# EAGLE board piezo-preamp-tickler_V3-1_single-supply-OPA1612 (EAGLE 8.4.3)

Size 100 x 66 mm. Coordinates in mm from the lower left corner, seen from the top.
Outline: 0,0 100,0 100,66 0,66 0,0
Copper layers (1*16): Top 0.0356mm / dielectric 1.5011mm / Bottom 0.0356mm
Design rules "oshpark-2layer *": minimum track width 16mil, minimum drill 13mil, track to track 16mil, track to pad 16mil, pad to pad 16mil, via to via 16mil, smd to smd 16mil, copper to edge 15mil, drill to drill 6mil, minimum pad ring 7mil, minimum via ring 7mil, stop-mask expansion 2.5mil, vias tented up to drill 0mil, thermal gap 10mil
Net classes: 0 default: width 0.152 mm, clearance 0.2 mm
Holes 4 mm at 5,5 95,5 5,61 95,60

## Footprints (pad centres in the part's own frame; a part is rotated, then mirrored left to right if it is on the bottom)
C1206 = smd 1.6 x 1.8: 1 -1.4,0; 2 1.4,0
E2,5-6E = drill 0.813 pad 1.575: + -1.27,0 | drill 0.813 pad 1.575 octagon: - 1.27,0
EIA7343-31/D-R = smd 2.55 x 2.7: + 3.175,0; - -3.175,0
C0805K = smd 1.1 x 1.4: 1 -1,0; 2 1,0
JST-PH-2-THM = drill 0.8 pad 1.422: 1 1,0; 2 -1,0
SOD123 = smd 1.4 x 1.4: A 1.9,0; C -1.9,0
TRRS_SJ-43514-SMT-TR = smd 1.524 x 3.175: EARTH -2.114,-5.271; RING1 2.644,2.759; RING2 0.66,-5.271; TIP 9.948,-5.271 | hole 1.778: 1.6,-1.15; 8.6,-1.15
SO08 = smd 0.6 x 2.2: 1 -1.905,-2.6; 2 -0.635,-2.6; 3 0.635,-2.6; 4 1.905,-2.6; 5 1.905,2.6; 6 0.635,2.6; 7 -0.635,2.6; 8 -1.905,2.6
1X02_LOCK = drill 1.016 pad 1.88: 1 -0.178,0; 2 2.718,0
1X03_LOCK = drill 1.016 pad 1.88: 1 0,0.127; 2 2.54,-0.127; 3 5.08,0.127
LBC-SE = drill 0.914 octagon: 1 -2.54,0; 2 2.54,0
LED3MM = drill 0.813 octagon: A -1.27,0; K 1.27,0
SOT23 = smd 1 x 1.4: 1 -0.95,-1.1; 2 0.95,-1.1; 3 0,1.1
TO92- = drill 0.7 octagon: 1 2.54,0; 2 0,0; 3 -2.54,0
R0603 = smd 1 x 1.1: 1 -0.85,0; 2 0.85,0
0204V = drill 0.813 pad 1.676 octagon: 1 -1.27,0; 2 1.27,0
TRIMPOT-MULTI = drill 0.8 octagon: P$1 -2.54,-4.699; P$3 -2.54,-2.159; P$4 -2.54,-2.159; P$6 -2.54,0.381; P$9 -2.54,4.191; P$10 0,-4.699; P$12 0,-2.159; P$13 0,-2.159; P$15 0,0.381; P$16 0,2.921; P$18 0,4.191; P$20 2.54,-4.699; P$21 2.54,-2.159; P$22 2.54,-2.159; P$24 2.54,0.381; P$27 2.54,4.191

## Placement (x,y rotation side)
C1  10uF  [C1206]  29,10 270 top
C1A  10uF  [E2,5-6E]  35,10 270 top
C2  10uF  [C1206]  50,55 270 top
C2A  10uF  [E2,5-6E]  57,55 270 top
C3  mnove  [EIA7343-31/D-R]  42,26 0 top
C3A  100uF  [E2,5-6E]  42,20 0 top
C4  0.1uF  [C0805K]  65,55 270 top
C4A  0.1uF  [E2,5-6E]  71,55 270 top
C5  0.1uF  [C0805K]  14,56 270 top
C5A  0.1uF  [E2,5-6E]  20,56 270 top
C6  10uF  [C1206]  50,39 0 top
C6A  10uF  [E2,5-6E]  50,33 0 top
CN1  [JST-PH-2-THM]  3,27 90 top
D1  1N4148W  [SOD123]  21,30 270 top
D2  1N4148W  [SOD123]  21,21 90 top
HEADSET  SJ-43514  [TRRS_SJ-43514-SMT-TR]  96,38 180 top
IC1  OPA1612  [SO08]  38.09,35.37 0 top
J1  [1X02_LOCK]  2,38 270 top
J2  phone/mixer-switch  [1X03_LOCK]  60,34 270 top
J3  phone/mixer-switch  [1X03_LOCK]  78.62,13.89 270 top
L1  100uH  [LBC-SE]  7,48 0 top
LED1  [LED3MM]  12,35 0 top
PHONE  SJ-43514  [TRRS_SJ-43514-SMT-TR]  96,14 180 top
Q1  J201  [SOT23]  30.05,29.07 0 top
Q1A  2N5486  [TO92-]  23,36 0 top
Q2  MMBFJ201  [SOT23]  75.05,33.17 0 top
Q2A  2N5486  [TO92-]  75,44 0 top
R1  100K  [R0603]  13,28 0 top
R1A  100K  [0204V]  13.73,21.3 0 top
R2  10M  [R0603]  21,13 90 top
R2A  10M  [0204V]  15,13 90 top
R3  1.2K  [R0603]  32,19 90 top
R3A  1.2K  [0204V]  27,19 90 top
R4  2.2K  [R0603]  21,45 90 top
R4A  2.2K  [0204V]  27,45 90 top
R5  2.2K  [R0603]  42,10 90 top
R5A  2.2K  [0204V]  48,11 90 top
R6  100K  [R0603]  35,57 90 top
R6A  100K  [0204V]  41,58 90 top
R7  100K  [R0603]  35,50 90 top
R7A  100K  [0204V]  41,50 90 top
R8  220  [R0603]  51,27 0 top
R8A  220  [0204V]  52,20 0 top
R9  220  [R0603]  80,58 0 top
R9A  220  [0204V]  81,52 0 top
R10  1K  [R0603]  66,34 180 top
R10A  1K  [0204V]  66,29 0 top
R11  1M  [R0603]  61,20 90 top
R11A  1M  [0204V]  67,21 90 top
R12  1.2K  [R0603]  73,23 90 top
R12A  1.2K  [0204V]  79,24 90 top
R13  2.2K  [R0603]  85,27 90 top
R13A  2.2K  [0204V]  91,27 90 top
R14  1.2K  [R0603]  12,41 180 top
R15  20K  [TRIMPOT-MULTI]  62,9 0 top

## Library data of the parts
C1 C4-C6 CN1 = adafruit
C1A C2 C2A C3A C4A C5A C6A = rcl
C3 = microbuilder
D1 D2 HEADSET PHONE Q1A Q2A R1 R1A R2 R2A R3 R3A R4 R4A R5 R5A R6 R6A R7 R7A R8 R8A R9 R9A R10 R10A R11 R11A R12 R12A R13 R13A R14 R15 = CMU-ArtFab
IC1 = linear
J1 = SparkFun-Connectors; V: +12V
J2 J3 = SparkFun-Connectors
L1 = inductors
LED1 = led
Q1 Q2 = transistor-fet

## Nets
+12V: J1.1 L1.1 R4.2 R4A.2 R14.2
DRAINE1: IC1.3 Q1.1 Q1A.3 R4.1 R4A.1 R5.2 R5A.2
GATE1: D1.C Q1.3 Q1A.1 R1.2 R1A.2 R2.2 R2A.2
GATE2: Q2.3 Q2A.1 R10.1 R10A.2 R11.2 R11A.2
GND: C1.2 C1A.- C2.2 C2A.- C4.2 C4A.- C5.2 C5A.- CN1.1 D2.C HEADSET.RING2 IC1.4 J1.2 LED1.K PHONE.RING2 R3.1 R3A.1 R5.1 R5A.1 R7.1 R7A.1 R11.1 R11A.1 R12.1 R12A.1 R13.1 R13A.1
N$1: C3.+ C3A.+ IC1.1 IC1.2
N$2: LED1.A R14.1
N$3: J2.3 R10.2 R10A.1
N$4: D1.A D2.A
N$16: IC1.5 R9.2 R9A.2
N$22: IC1.6 R8.2 R8A.2 R15.P$1 R15.P$3 R15.P$4 R15.P$6 R15.P$9
N$23: C6.2 C6A.- J2.2
N$24: CN1.2 R1.1 R1A.1
N$31: C6.1 C6A.+ IC1.7 R15.P$10 R15.P$12 R15.P$13 R15.P$15 R15.P$16 R15.P$18
N$32: C5.1 C5A.+ IC1.8 L1.2 R6.2 R6A.2
N$35: C2.1 C2A.+ C4.1 C4A.+ R2.1 R2A.1 R6.1 R6A.1 R7.2 R7A.2 R9.1 R9A.1
N$42: J2.1 J3.1
N$44: HEADSET.TIP PHONE.TIP
N$45: HEADSET.RING1 PHONE.RING1
N$46: J3.2 PHONE.EARTH
N$52: C3.- C3A.- R8.1 R8A.1
NAME: J3.3 Q2.1 Q2A.3 R13.2 R13A.2
SOURCE: Q2.2 Q2A.2 R12.2 R12A.2
SOURCE1: C1.1 C1A.+ Q1.2 Q1A.2 R3.2 R3A.2

## Tracks (layer width: path | path; a pad name or v marks a point on that pad's centre or on a via)
+12V  (4 unrouted)
DRAINE1  (6 unrouted)
GATE1  (6 unrouted)
GATE2  (5 unrouted)
GND  (26 unrouted)
N$1  (3 unrouted)
N$2  (1 unrouted)
N$3  (2 unrouted)
N$4  (1 unrouted)
N$16  (2 unrouted)
N$22  (6 unrouted)
N$23  (2 unrouted)
N$24  (2 unrouted)
N$31  (7 unrouted)
N$32  (5 unrouted)
N$35  (11 unrouted)
N$42  (1 unrouted)
N$44  (1 unrouted)
N$45  (1 unrouted)
N$46  (1 unrouted)
N$52  (3 unrouted)
NAME  (4 unrouted)
SOURCE  (3 unrouted)
SOURCE1  (5 unrouted)

## Text on the board
tNames: Ali Momeni 2017 | Tickler Preamp v.3-single-OPA1612